# Altium PCB Tag102 Rev17.PcbDoc
Units mm, origin at the board's own origin, x right, y up, seen from the top; angles counter-clockwise.
Board outline 48.31 x 25.12 mm, 2 copper layers (TopLayer, BottomLayer), stack 1.641 mm thick; 77 components, 47 nets, 219 pads, 77 vias.
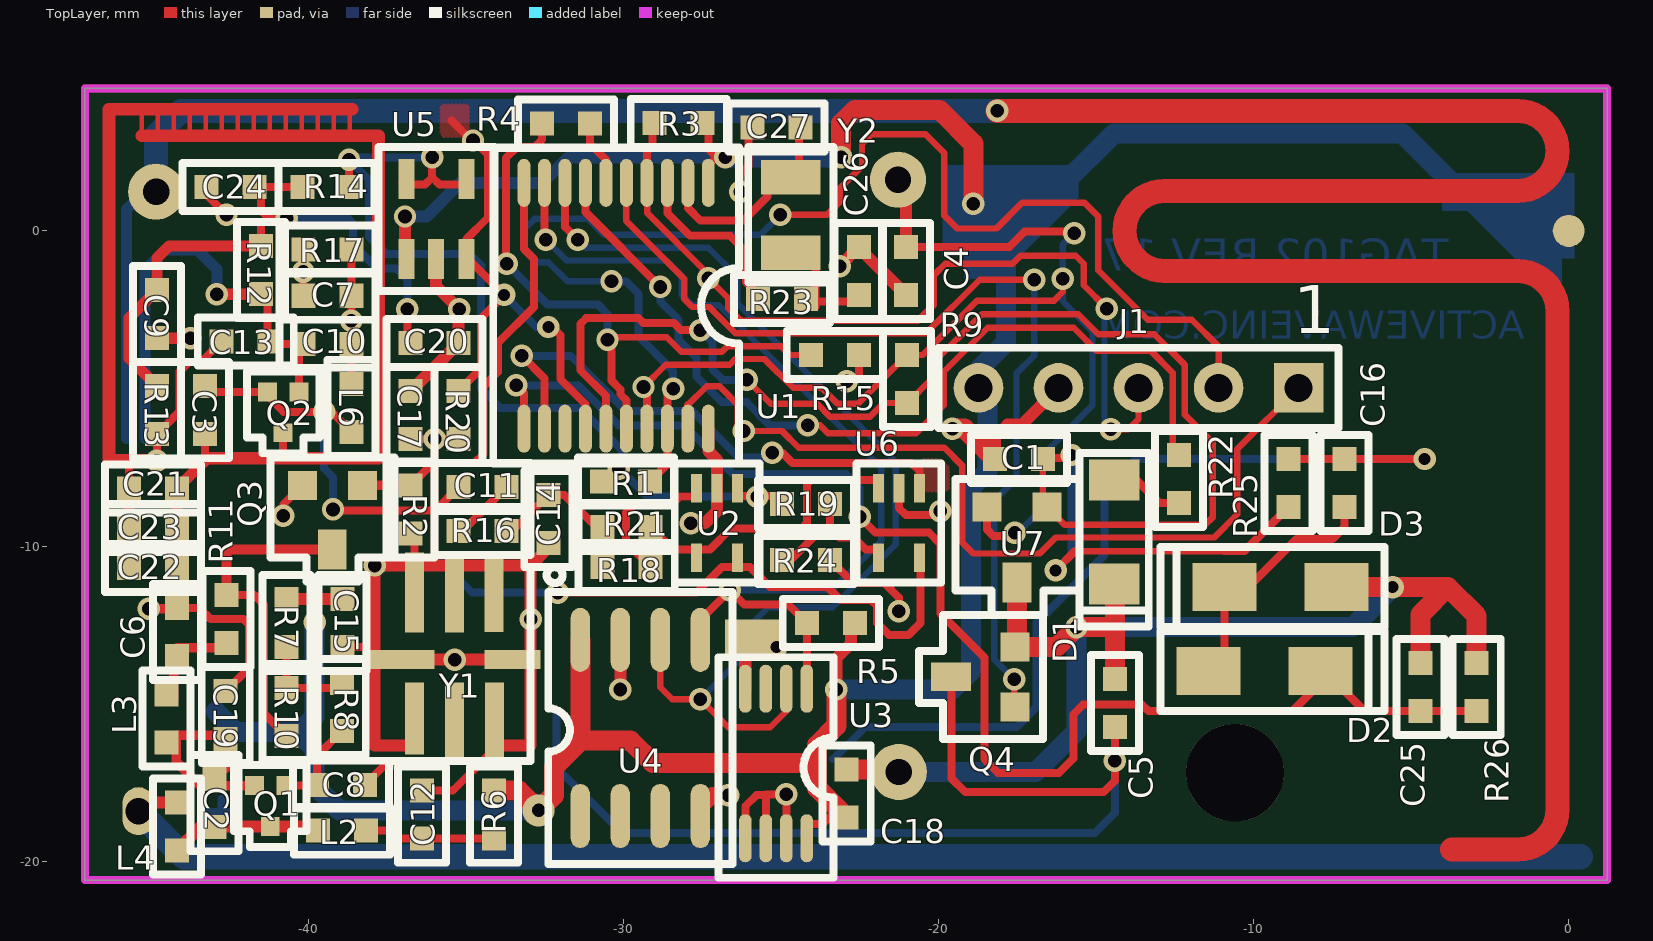
[diagram p0: TopLayer view]
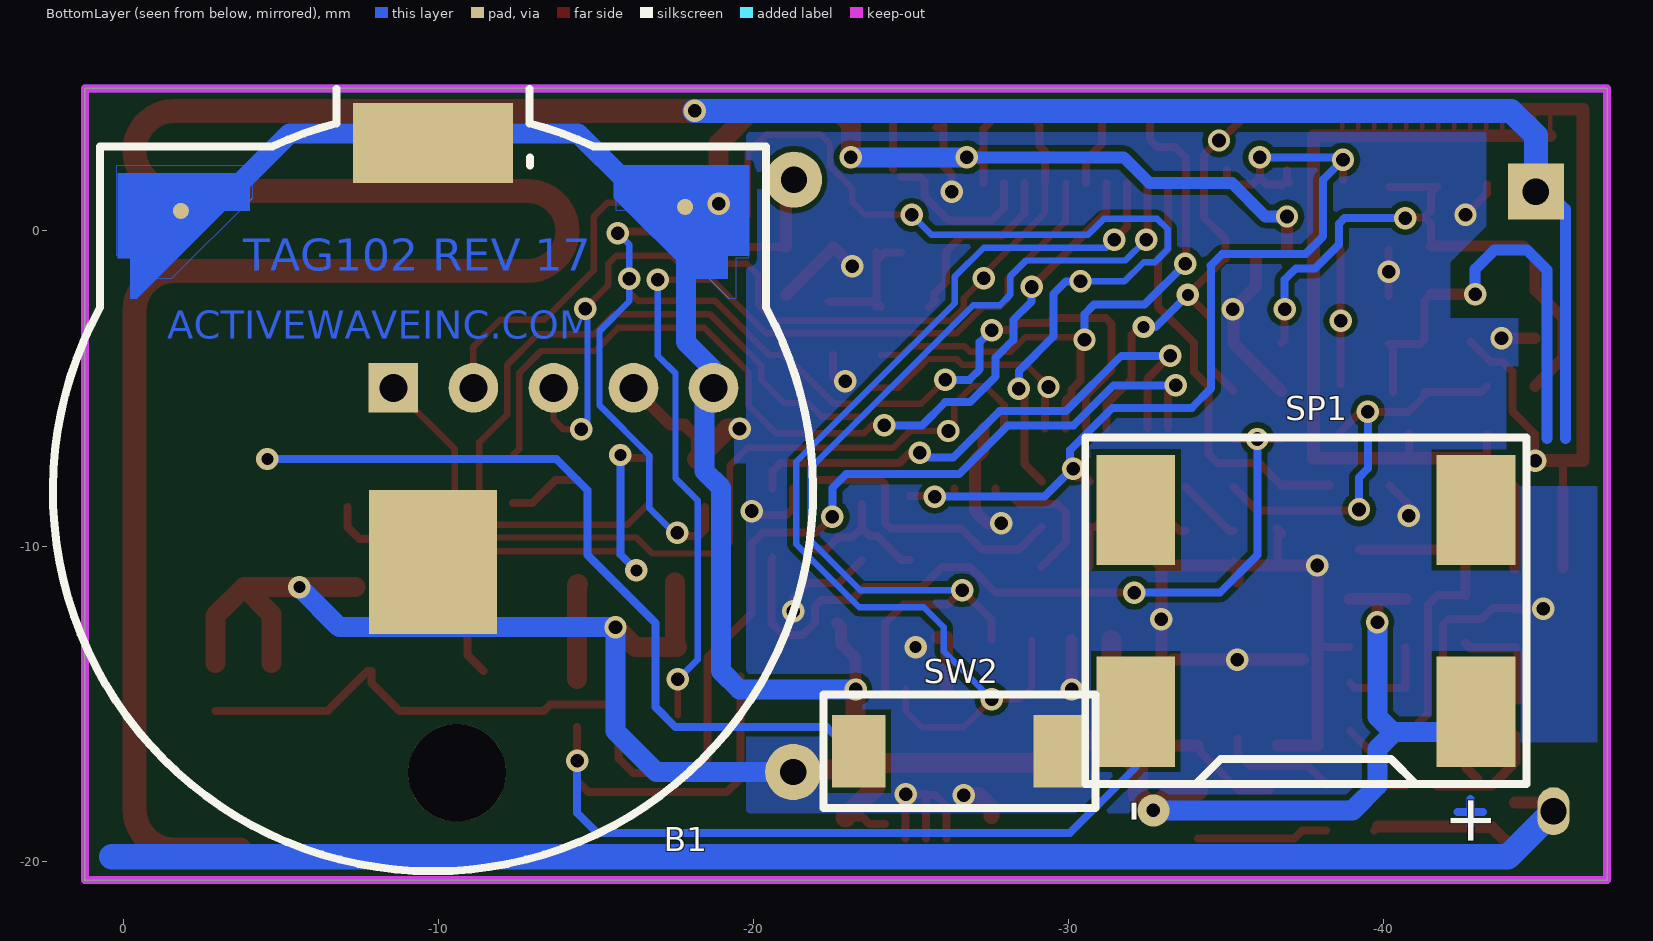
[diagram p1: BottomLayer view, seen from below]

## Layer stack, top to bottom
TopLayer: signal copper 0.0356
Dielectric: core 1.57, FR-4, Dk 4.8
BottomLayer: signal copper 0.0356

## Board outline
-47.092,4.521 1.219,4.521 1.219,-20.599 -47.092,-20.599

## Design rules (kind name [scope] priority, off if disabled: settings)
Clearance Clearance_1 [All] p1: gap=0.178
ComponentClearance [All] p1 off: gap=0.254 collisioncheckmode=0 verticalgap=0.254
HoleSize [All] p1 off: absolutevalues=TRUE maxlimit=2.54 minlimit=0.025 maxpercent=80.000 minpercent=20.000
PolygonConnect [All] p1: connectstyle=Direct reliefconductorwidth=0.508 reliefentries=4 polygonreliefangle="90 Angle"
RoutingVias [All] p1: holewidth=0.381 width=0.711 viastyle="Through Hole" minholewidth=0.381 minwidth=0.711 maxholewidth=0.381 maxwidth=0.711
ShortCircuit ShortCircuit_1 [InNet('NetC13_2') vs InNet('NetC3_1')] p1: allowed=TRUE
ShortCircuit [All] p2: allowed=FALSE
SolderMaskExpansion [All] p1: expansion=0.102
TestPointUsage [All] p1: valid=0 allowmultiple=FALSE
Testpoint [All] p1: side=15 testpointundercomponent=TRUE minsize=1.016 maxsize=2.54 preferedsize=1.524 minholesize=0.508 maxholesize=1.016 preferedholesize=0.813 testpointgrid=0.025 style=1023 order=0123456789
Width [All] p1: maxlimit=2.54 minlimit=0.152 preferedwidth=0.254
16 further rules are at their usual default settings.

## Classes and differential pairs
component class PAGE1: C1 C2 C4 C5 C6 C8 C12 C15 C16 C18 C19 C25 C26 C27 D1 D2 D3 E1 J1 L2 L3 L4 Q1 Q3 Q4 R1 R2 R3 R4 R5 R6 R7 R8 R9 R10 R11 R15 R22 R23 R25 R26 SP1 SP2 SW1 SW2 U1 U3 U4 U7 Y1 Y2
component class PAGE2: B1 C3 C7 C9 C10 C11 C13 C14 C17 C20 C21 C22 C23 C24 E2 L6 Q2 R12 R13 R14 R16 R17 R18 R19 R20 R21 R24 U2 U5 U6

## Components (designator, comment, footprint, x,y, rotation, side; value= is the part's Value field where it differs from the comment)
B1 "BATT HOLDER COIN CR2032 CUT" "BATT HOLDER COIN CR2032 CUT" -9.83,-8.255 r180 bottom
C1 "0.1 uF" 0603 -16.688,-7.239 r180 top
C2 "2 PF" 0603 -42.977,-18.923 r90 top
C3 "2 pF" 0603 -43.282,-6.452 r90 top
C4 "10pF" 0603 -21.031,-0.508 r270 top
C5 ".1uF" 0603 -14.402,-15.748 r90 top
C6 "100 pF" 0603 -44.171,-11.963 r270 top
C7 "100 pF" 0603 -38.633,-2.057 r180 top
C8 "1000 pF" 0603 -39.726,-17.577 r0 top
C9 "1000 pF" 0603 -44.806,-1.88 r270 top
C10 "1000 pF" 0603 -40.157,-3.581 r0 top
C11 ".1uF" 0603 -35.23,-8.128 r0 top
C12 "33 pF" 0603 -36.388,-19.289 r90 top
C13 "33 pF" 0603 -41.224,-3.505 r180 top
C14 "100pF" 0603 -32.385,-9.906 r90 top
C15 "0.1 uF" 0603 -38.913,-11.684 r270 top
C16 "20pF" 0603 -7.112,-8.763 r90 top
C17 ".01uF" 0603 -36.754,-5.08 r270 top
C18 "0.1 uF" 0603 -22.914,-18.618 r90 top
C19 "2.7 pF" 0603 -42.621,-16.129 r90 top
C20 "15pF" 0603 -35.23,-3.556 r180 top
C21 "1.5pF" 0603 -45.695,-8.179 r0 top
C22 "DNS" 0603 -45.695,-10.693 r0 top
C23 "DNS" 0603 -45.695,-9.423 r0 top
C24 "0.1 uF" 0603 -43.231,1.397 r0 top
C25 "0.1pF" 0603 -4.699,-15.24 r90 top
C26 "15pF" 0603 -22.53,-0.508 r270 top
C27 "15pF" 0603 -25.908,3.277 r0 top
D1 "LED" 404-1032-2-ND -14.427,-9.55 r90 top
D2 "1N4148" SOD123_021405 -9.652,-13.97 r180 top
D3 "1N4148" SOD123_021405 -9.144,-11.303 r0 top
J1 "1X5 HEADER" "1X5 HEADER" -13.652,-4.978 r180 top locked
L2 "10nH" 0603 -38.166,-19.035 r180 top
L3 "0.18uH" 0603 -44.501,-14.708 r270 top
L4 "10nH" 0603 -44.171,-18.136 r270 top
L6 "0.33uH" 0603 -38.633,-6.375 r90 top
Q1 "NE85619" "3 PIN ULTRA SUPER MINI MOLD" -41.707,-17.602 r270 top
Q2 "NE85619" "3 PIN ULTRA SUPER MINI MOLD" -41.3,-5.105 r270 top
Q3 "2N7002" "SOT23 FET" -38.278,-8.077 r180 top
Q4 "FDN327N" "SOT23 FET" -17.577,-15.113 r90 top
R1 "39K" 0603 -29.159,-7.95 r180 top
R2 "1 M" 0603 -36.754,-9.601 r90 top
R3 "39k" 0603 -29.007,3.429 r0 top
R4 "39k" 0603 -32.588,3.404 r0 top
R5 "39k" 0603 -24.181,-12.446 r0 top
R6 "22" 0603 -34.102,-19.289 r90 top
R7 "6.8K" 0603 -40.691,-11.684 r270 top
R8 "4.7 K" 0603 -38.938,-15.875 r90 top
R9 "39K" 0603 -21.006,-5.461 r90 top
R10 "39K" 0603 -40.691,-14.503 r270 top
R11 "68" 0603 -42.596,-13.081 r90 top
R12 "10" 0603 -41.504,-2.007 r90 top
R13 "10" 0603 -44.806,-4.928 r270 top
R14 "470" 0603 -40.183,1.397 r0 top
R15 "39K" 0603 -22.53,-3.937 r180 top
R16 "22K" 0603 -35.23,-9.525 r0 top
R17 "2K" 0603 -38.633,-0.584 r180 top
R18 "1K" 0603 -30.658,-10.668 r0 top
R19 "2K" 0603 -24.968,-8.661 r0 top
R20 "2.7K" 0603 -35.23,-5.08 r270 top
R21 "220K" 0603 -30.658,-9.398 r0 top
R22 "200" 0603 -12.37,-8.636 r90 top
R23 "300K" 0603 -25.73,-2.159 r0 top
R24 "100K" 0603 -24.968,-10.439 r0 top
R25 "300K" 0603 -8.89,-8.763 r90 top
R26 "4.7M" 0603 -2.921,-15.24 r90 top
SP1 "SPEAKER" SMT_1028-S-R -37.529,-12.058 r270 bottom
SW2 "TILT SWITCH" SQ-SEN-200 -26.543,-16.51 r180 bottom
U1 "PIC16F690" "SSOP20 WIDE" -27.305,1.524 r180 top locked
U2 "MIC861" SC70 -27.026,-9.271 r180 top
U3 "DS1631" "SO8 SMALL" -24.181,-14.529 r180 top locked
U4 "24aa256" SO8 -31.369,-18.567 r90 top
U5 "TC1070" SOT23-5A -36.881,-0.889 r90 top
U6 "MAX9119EXK+" SC70 -21.26,-9.271 r180 top
U7 "TLE4913" SOT23W -16.561,-8.763 r180 top
Y1 "916.5_Resonator" RESONATOR -35.357,-13.614 r0 top
Y2 "32.768KHZ CRYSTAL" "CRYSTAL ABRACON ABS07" -24.689,0.508 r270 top

## Footprints (in the part's own frame and the unit in brackets; to place one, negate y for a bottom-side part, rotate by r counter-clockwise, add the part's x,y. Pads: shape width x height; smd on the part's side, far side on the other; paste and mask are expansions set on the pad)
"1X5 HEADER" [mil]
  rect 62x62 hole 35: 1(-200,0)
  round 62 hole 35: 2(-100,0) 3(0,0) 4(100,0) 5(200,0)
  silkscreen extent -250,-50 250,50
"3 PIN ULTRA SUPER MINI MOLD" [mm]
  rect 0.6x0.6 smd: B(0,1) C(1.3,0.5) E(0,0)
  silkscreen extent -0.65,-0.65 1.95,1.65
404-1032-2-ND [mm]
  rect 1.3x1.6 smd: A(1.65,0) K(-1.65,0)
  silkscreen extent -3,-1.1 2.5,1.1
0603 [mil]
  rect 30x30 smd: 1(0,0) 2(60,0)
  silkscreen extent -30,-30 90,30
"BATT HOLDER COIN CR2032 CUT" [mil]
  rect 160x180 smd: 1(0,-88.88)
  round 20 smd: 2(-315,350) 2(315,355)
  rect 200x100 smd: 2(0,435)
  TopLayer region: -394,397 -229,397 -229,350 -260,350 -370,240 -378,240 -378,291 -394,291
  TopLayer region: 395,407 395,294 368,294 368,265 327,265 226,366 226,407
  silkscreen extent -475,-475 475,502
"CRYSTAL ABRACON ABS07" [mm]
  rect 1.1x1.9 smd: 1(-1.2,0) 2(1.2,0)
  silkscreen extent -2.15,-1.35 2.15,1.35
RESONATOR [mm]
  rect 0.6x2.54 smd: 1(1.245,2.159) 2(0,2.134) 3(-1.27,2.134) 6(0,-1.983) 7(1.27,-1.983)
  rect 2.286x0.6 smd: 4(-1.776,0.008)
  rect 0.6x2.286 smd: 5(-1.27,-1.856)
  rect 1.778x0.6 smd: 8(1.831,0.008)
  silkscreen extent 2.92,2.44 3.43,2.95
SC70 [mm]
  rect 0.35x0.9 smd: 1(-0.65,-1.1) 2(0,-1.1) 3(0.65,-1.1) 4(0.65,1.1) 5(-0.65,1.1)
  silkscreen extent -1.35,-1.89 1.35,1.89
SMT_1028-S-R [mm] "TRANSDUCER"
  rect 3.5x2.5 smd: 1(3.2,5.4) 2(3.2,-5.4) 3(-3.2,-5.4) 4(-3.2,5.4)
  silkscreen extent -5.5,-7 5.5,7
SO8 [mil]
  oval 80x24 smd: 1(0,0) 2(0,-50) 3(0,-100) 4(0,-150) 5(220,-150) 6(220,-100) 7(220,-50) 8(220,0)
  silkscreen extent -60,-190 280,40
"SO8 SMALL" [mil]
  oval 16x60 smd: 1(0,0) 2(25.59,0) 3(51.18,0) 4(76.77,0) 5(76.77,186.85) 6(51.18,186.85) 7(25.59,186.85) 8(0,186.85)
  silkscreen extent -33,-39 110,236
SOD123_021405 [mil]
  rect 80x60 smd: A(70,0) K(-70,0)
  silkscreen extent -150,-50 130,50
"SOT23 FET" [mil]
  rect 36x50 smd: D(38,80)
  rect 36x36 smd: G(0,0) S(75,0)
  silkscreen extent -40,-35 115,120
SOT23-5A [mil]
  rect 50x20 smd: 1(0,0) 2(0,-37) 3(0,-75) 4(100,-75) 5(100,0)
  silkscreen extent -40,-110 140,35
SOT23W [mil]
  rect 36x36 smd: 1(0,0) 2(74.8,0)
  rect 36x50 smd: 3(37.4,94.49)
  silkscreen extent -41,-35 114,134
SQ-SEN-200 [mm]
  rect 1.7x2.3 smd: 1(-3.2,0) 2(3.2,0)
  silkscreen extent -4.32,-1.8 4.32,1.8
"SSOP20 WIDE" [mil]
  oval 16x60 smd: 1(0,0) 2(25.59,0) 3(51.18,0) 4(76.77,0) 5(102.36,0) 6(127.95,0) 7(153.54,0) 8(179.13,0) 9(204.72,0) 10(230.32,0) 11(230.32,307.09) 12(204.72,307.09) 13(179.13,307.09) 14(153.54,307.09) 15(127.95,307.09) 16(102.36,307.09) 17(76.77,307.09) 18(51.18,307.09) 19(25.59,307.09) 20(0,307.09)
  silkscreen extent -38,-45 269,350

## Part data
B1: library part BATTERY, "Battery"
C1 C2 C3 C4 C5 C6 C7 C8 C9 C10 C12 C13 C15 C16 C18 C19 C20 C21 C23 C24 C25: library part CAP, "Capacitor"
C11 C14 C17 C26 C27: library part C
C22: library part "CAPACITOR VAR"
D2 D3: library part DIODE, "Diode"
J1: library part CON5, "Connector"
L2 L3 L4 L6: library part INDUCTOR
Q1 Q2: library part NPN1, "NPN Transistor"
Q3 Q4: library part "FET 2"
R1 R2 R3 R4 R5 R6 R7 R8 R9 R10 R15 R17 R23 R25 R26: library part RESISTOR
R11 R22: library part RES1
R12 R13 R14 R16 R18 R19 R20 R21 R24: library part R
SW2: library part "SWITCH PB"
U2: library part "OPAMP MIC861"
U4: library part 24AA256
U5: library part TC1070-2
U6: library part "COMPARATOR MAX9117"
U7: library part "HALL EFFECT SWITCH"
Y1: library part RESONATOR
Y2: library part CRYSTAL, "Crystal"

## Free pads (board coordinates)
  rect 1.88x1.143 smd: 0(-25.832,-12.903)
  round 1.016 smd: 0(0,0)
  oval 1.016x1.524 hole 0.838: 1(-45.39,-18.415)
  rect 1.778x1.778 smd far side: 1(-44.831,1.245)
  round 1.778 hole 0.838: 1(-44.831,1.245) 1(-21.285,1.626)
  round 1.778 hole 0.838 mask+0.254: 1(-21.26,-17.17)
  round 3.099 hole 3.099: 1(-10.592,-17.196)

## Via types
v1: diameter 0.711, hole 0.432, TopLayer to BottomLayer, tented both sides, 60 vias
v2: diameter 0.711, hole 0.432, TopLayer to BottomLayer, 9 vias
v3: diameter 0.711, hole 0.381, TopLayer to BottomLayer, 7 vias
v4: diameter 1.016, hole 0.432, TopLayer to BottomLayer, 1 vias

## Nets (pads, with @x,y where several pads share a name; then routed paths per layer and width w, separated by ;. In a path a pad name is that pad's centre, name@x,y a point inside that pad or via, vN(x,y) a via of type N, cw(c..) or ccw(c..) an arc to the next point about the centre after c; other vN are vias at no path point)
3V: B1.2 C15.1 C18.1 J1.5 R3.2 R5.2 R6.2 R7.1 SP1.1 U1.1 U3.8 U4.8 U5.1 | length 101
  TopLayer w0.254: R3.2 -27.305,3.251 -27.305,2.591 v1@-27.051,2.337 ; U1.1 -27.305,2.083 v1@-27.051,2.337 ; v1(-26.772,2.337) v1@-27.051,2.337 ; U3.8@-24.181,-18.821 -23.676,-18.821 -23.473,-18.618 C18.1
  TopLayer w0.381: R7.1 -39.802,-11.684 ; v1(-39.802,-12.421) -39.802,-11.684 ; C15.1 -39.802,-11.684 ; U5.1@-36.932,-0.61 v1(-36.932,0.457) ; v1(-23.241,-14.554) -23.241,-13.564 -22.784,-13.106 -22.784,-12.573 R5.2
  TopLayer w0.635: R6.2 -33.314,-17.765 v4(-32.69,-18.39) -32.21,-17.91 -32.21,-17.016 -31.369,-16.175 ; U4.8 -31.369,-16.175 ; v1(-23.241,-14.554) -23.241,-15.708 -23.851,-16.317 -23.851,-16.891 ; v1(-23.089,2.337) -23.089,3.404 -22.657,3.835 -19.964,3.835 -18.898,2.769 v1(-18.898,0.864) ; C18.1 -23.851,-17.682 -23.851,-16.891 ; -31.369,-16.175 -29.773,-16.175 -29.058,-16.891 -23.851,-16.891
  BottomLayer w0.381: v1(-36.932,0.457) -36.246,0.457 -35.179,1.524 -32.563,1.524 -31.75,2.337 v1(-26.772,2.337)
  BottomLayer w0.635: SP1.1 -42.287,-15.9 -40.284,-15.9 ; v1(-39.802,-12.421) -39.802,-15.418 -40.284,-15.9 ; v4(-32.69,-18.39) -39.014,-18.39 -39.802,-17.602 -39.802,-16.434 -40.284,-15.951 -40.284,-15.9 ; v1(-26.772,2.337) v1(-23.089,2.337) ; v1(-23.241,-14.554) -19.558,-14.554 -18.974,-13.97 -18.974,-8.153 -18.44,-7.62 -18.44,-5.271 J1.5 -18.732,-4.407 -17.856,-3.531 -17.856,-0.229 ; -16.078,1.448 -14.427,3.099 -9.83,3.099 -5.283,3.099 -3.632,1.448
+V1.2: R1.2 R14.2 R19.1 U2.1 U5.4 U5.5 | length 30.6
  TopLayer w0.254: R14.2@-38.71,1.6 v1(-38.71,2.261) ; U5.5@-37.008,1.524 U5.5@-36.932,1.6 ; U5.5@-36.932,1.93 -36.932,1.651 U5.5@-36.932,1.6 ; U5.5@-36.779,1.448 U5.5@-36.932,1.6 ; U5.5@-36.779,1.473 -36.297,1.473 -36.068,1.702 ; v1(-36.068,2.337) -36.068,1.702 ; U5.4@-35.052,1.448 -35.027,1.473 U5.4@-35.027,1.575 ; U5.4@-35.052,1.473 -35.839,1.473 -36.068,1.702 ; U5.4@-35.027,1.93 -35.027,1.651 U5.4@-35.027,1.575 ; U5.4@-34.976,1.524 U5.4@-35.027,1.575 ; R1.2 -30.556,-7.823 -30.251,-7.823 -30.061,-7.633 v1@-30.048,-7.62 ; U2.1@-26.376,-8.39 U2.1 ; U2.1@-26.358,-8.407 -25.756,-8.407 R19.1@-24.968,-8.407
  BottomLayer w0.254: v1(-38.71,2.261) -38.075,1.626 -38.075,-0.178 -37.516,-0.737 -34.874,-0.737 -34.51,-1.101 ; v1@-38.71,2.337 v1(-36.068,2.337) ; -34.519,-1.109 -34.519,-5.004 -33.909,-5.613 -31.394,-5.613 -30.048,-6.96 -30.048,-7.544 -30.048,-7.62 -29.235,-8.433 v1(-25.756,-8.433)
  other v1: -30.15,-7.544
ANT: L4.1 pad.1@-45.39,-18.415 | length 47.2
  TopLayer w0.381: pad.1@-45.11,-18.136 L4.1
  BottomLayer w0.813: pad.1@-45.364,-18.44 -43.942,-19.863 0.356,-19.863
ENABLE_RCVR: R20.1 U1.14 U5.3 | length 16.1
  TopLayer w0.254: -35.458,3.505 v2@-34.798,2.845 ; R20.1 -34.519,-4.369 -34.519,-2.769 v3(-33.782,-2.032) -34.925,-0.889 U5.3 -34.976,-0.254 -34.29,0.432 -34.29,2.413 -34.747,2.87 v2(-34.773,2.87) ; v3(-32.385,-3.048) -32.258,-3.048 -32.004,-3.302 -32.004,-4.699 -31.205,-5.498 U1.14
  BottomLayer w0.254: v3(-33.782,-2.032) -32.766,-3.048 v3(-32.385,-3.048)
GND: B1.1 C1.2 C4.2 C5.2 C6.1 C7.2 C9.2 C12.2 C14.1 C15.2 C17.1 C18.2 C19.2 C20.1 C24.1 C25.2 C26.1 C27.1 D1.K D3.A J1.4 pad.0@-25.832,-12.903 pad.1@-21.26,-17.17 Q3.S Q4.S R2.1 R15.1 R17.2 R24.2 R26.2 SW2.2 U1.20 U2.2 U3.4 U3.5 U3.6 U3.7 U4.4 U4.7 U5.2 U6.2 U7.3 Y1.1 Y1.2 Y1.3 Y1.4 Y1.5 Y1.7 Y1.8 | length 115.6
  TopLayer w0.254: C6.1 -43.459,-11.963 -43.104,-12.319 -42.062,-12.319 -41.885,-12.497 -41.885,-13.868 C19.2 ; C24.1@-43.282,1.473 -43.282,1.397 -43.282,1.194 v1(-42.596,0.508) ; v1(-40.792,-9.042) -40.792,-8.687 Q3.S ; C7.2 v1(-40.157,-1.295) R17.2 ; C15.2 -37.948,-13.208 -37.897,-13.157 ; R2.1 -36.63,-9.725 Y1.3@-36.63,-10.617 ; C12.2 -35.418,-17.765 -34.188,-16.535 -34.188,-16.434 Y1.7@-34.087,-16.332 ; Y1.2@-35.357,-10.617 Y1.2@-35.233,-10.494 ; v1(-26.289,1.245) -26.289,1.803 -26.035,2.057 -26.035,3.277 C27.1@-26.035,3.353 ; U3.5 -26.131,-18.257 -25.781,-17.907 -25.495,-17.907 -25.481,-17.893 ; C27.1 C27.1@-25.806,3.277 ; U3.6 -25.481,-17.893 ; U3.7 v1(-24.831,-17.878) -25.466,-17.878 -25.481,-17.893 ; R24.2 -22.708,-11.176 -21.717,-11.176 -21.26,-11.633 v1(-21.26,-12.065) ; v1(-22.911,-4.775) -22.682,-4.775 -22.53,-4.623 R15.1 ; pad.1@-21.336,-17.094 pad.1@-21.26,-17.17 ; U6.2 -21.26,-8.788 -21.031,-9.017 v1@-19.939,-9.017
  TopLayer w0.305: v1(-45.06,-11.989) C6.1@-44.171,-11.989 ; R2.1 R2.1@-36.627,-9.474
  TopLayer w0.356: C9.2 v1(-43.739,-3.404)
  TopLayer w0.381: Y1.4@-37.438,-13.606 Y1.4 v1(-35.357,-13.606) Y1.8 Y1.8@-33.319,-13.606 ; C17.1 C20.1 -35.23,-2.515 v1(-35.204,-2.489) -35.941,-1.753 U5.2 ; Y1.5@-36.627,-16.332 -37.897,-16.332 -37.897,-13.606 -37.897,-13.157 v1(-37.897,-10.617) -36.63,-10.617 -36.627,-10.617 Y1.2@-35.357,-10.617 ; Y1.2@-35.357,-11.125 Y1.2@-35.357,-10.617 ; Y1.7@-34.087,-16.332 -32.944,-16.332 -32.944,-13.606 v1(-32.944,-12.319) -32.944,-10.617 ; C14.1 -32.385,-10.058 -32.944,-10.617 ; v1(-30.099,-14.554) U4.7 ; v1(-27.864,-9.271) -27.407,-9.271 -27.026,-8.89 U2.2 -27.026,-7.264 -27.305,-6.985 U1.20 ; v1(-23.139,-1.118) C26.1@-22.543,-0.521 ; C26.1 C26.1@-22.543,-0.521 ; C4.2 C26.1@-22.543,-0.521 ; C1.2 -18.212,-6.553 -17.805,-6.147 -17.361,-6.147 J1.4 ; Y1.2@-35.357,-10.617 -34.112,-10.617 -32.944,-10.617
  TopLayer w0.406: U3.4 -26.131,-12.903 pad.0@-25.832,-12.903
  TopLayer w0.508: U4.4 -27.559,-18.288 -27.178,-17.907 v1(-26.67,-17.907)
  TopLayer w0.635: C18.2 pad.1@-21.336,-17.094 ; v1(-19.558,-6.274) -19.177,-6.274 C1.2 ; U7.3 -17.511,-13.142 Q4.S -16.256,-13.208 v1(-15.621,-12.573) -14.402,-12.573 ; D1.K -14.402,-11.226 -14.402,-12.573 ; C5.2 -14.402,-12.573 ; D3.A v3(-5.588,-11.303) -3.835,-11.303 ; C25.2 -4.699,-12.167 -3.835,-11.303 ; R26.2 -2.921,-12.217 -3.835,-11.303
  BottomLayer w0.635: pad.1@-21.26,-17.17 -16.916,-17.17 -15.621,-15.875 v1(-15.621,-12.573) -9.83,-12.573 -6.858,-12.573 v3(-5.588,-11.303)
  other v1: -19.939,-8.89
  other v3: -25.146,-13.208
I2CSCL: U1.8 U3.2 U4.6 | length 33.7
  TopLayer w0.203: U4.6 -28.829,-14.478 -28.448,-14.859 v1(-27.559,-14.859) -26.67,-15.748 -25.339,-15.748 -24.831,-15.24 U3.2
  TopLayer w0.254: U1.8 -31.855,0.13 v1(-31.445,-0.279)
  BottomLayer w0.203: v1(-31.445,-0.279) -31.191,-0.533 -27.305,-0.533 -26.391,-1.448 -26.391,-2.3 -21.361,-7.329 -21.361,-9.947 -23.36,-11.946 ; v1(-27.559,-14.859) -26.035,-13.335 -26.035,-12.573 -25.4,-11.938 -23.368,-11.938
I2CSDA: R5.1 U1.9 U3.1 U4.5 | length 30.4
  TopLayer w0.254: v1@-32.505,-0.236 U1.9 ; U4.5 -27.559,-12.344 v1(-26.619,-11.405) -26.162,-11.862 -24.765,-11.862 R5.1 U3.1
  BottomLayer w0.203: v1(-32.461,-0.279) -31.801,-0.94 -28.651,-0.94 -28.143,-1.448 -28.143,-2.032 -27.813,-2.362 -26.975,-2.362 -21.819,-7.518 -21.819,-9.83 -23.393,-11.405 v1(-26.619,-11.405)
  BottomLayer w0.254: v1(-32.461,-0.279) v1@-32.45,-0.279
"LED OUT": R22.2 U1.7 | length 28.8
  TopLayer w0.203: v2(-24.155,-6.173) -23.749,-6.173 -23.495,-6.426 -20.726,-6.426 -19.837,-5.537 -19.837,-4.47 -18.44,-3.073 -15.713,-3.073 -14.977,-3.81 -13.259,-3.81 -12.573,-4.496 -12.573,-6.909 R22.2
  TopLayer w0.254: U1.7 -31.205,0.598 v1(-28.829,-1.778)
  BottomLayer w0.254: v1(-28.829,-1.778) -28.829,-2.235 -28.245,-2.819 -28.245,-3.454 -27.686,-4.013 -27.686,-4.623 -26.873,-5.436 -26.086,-5.436 -25.349,-6.173 v2(-24.155,-6.173)
NetC2_1: C2.1 L2.2 L4.2 Q1.C | length 4.8
  TopLayer w0.254: L2.2@-39.823,-18.902 L2.2
  TopLayer w0.381: L4.2 -43.434,-18.923 C2.1 ; C2.1@-42.977,-18.902 Q1.C L2.2@-39.823,-18.902
NetC2_2: C2.2 C19.1 L3.2 Q1.E | length 6.7
  TopLayer w0.305: C2.2 -42.621,-17.043 C19.1 -42.748,-16.002 -44.196,-16.002 -44.196,-16.232 -44.196,-16.84 -43.434,-17.602 -42.977,-17.602 Q1.E
NetC3_1: C3.1 C21.2 C22.2 C23.2 Q2.C | length 7.9
  TopLayer w0.254: C3.1 -43.282,-7.137 -43.205,-7.214 ; Q2.C -40.8,-7.206 -40.792,-7.214
  TopLayer w0.356: C22.2 C23.2 C21.2 -43.205,-7.214
  TopLayer w0.406: -43.205,-7.214 -40.792,-7.214
NetC3_2: C3.2 C11.1 L6.1 Q2.E | length 12.8
  TopLayer w0.254: C3.2 -43.104,-5.105 Q2.E -41.3,-5.232 -40.792,-5.74 v1(-39.497,-5.74) -39.268,-5.74 L6.1 ; v1(-39.218,-8.839) -39.192,-8.865 -35.966,-8.865 C11.1
  BottomLayer w0.254: v1(-39.497,-5.74) -39.497,-7.544 -39.218,-7.823 v1(-39.218,-8.839)
NetC5_1: C5.1 Q4.D SP1.2 | length 32.7
  TopLayer w0.254: Q4.D@-19.583,-14.148 -19.583,-17.374 -19.152,-17.805 -14.757,-17.805 -14.402,-17.45 v1(-14.402,-16.815) C5.1
  BottomLayer w0.254: SP1.2 -32.129,-17.02 -30.048,-19.101 -15.037,-19.101 -14.402,-18.466 v1(-14.402,-16.815)
NetC6_2: C6.2 L3.1 R11.1 | length 3.1
  TopLayer w0.305: L3.1@-44.272,-14.884 -44.272,-14.708 -44.272,-13.487 C6.2@-44.272,-13.386 ; C6.2@-44.171,-13.233 -42.748,-13.233 R11.1
NetC7_1: C7.1 C10.2 L6.2 R17.1 | length 4.3
  TopLayer w0.254: L6.2 C10.2 v2(-38.633,-2.845) C7.1 R17.1
NetC8_1: C8.1 Q1.B R8.1 | length 3
  TopLayer w0.254: Q1.B -39.726,-17.602 C8.1 -39.726,-16.662 R8.1
NetC8_2: C8.2 Y1.6 | length 3.7
  TopLayer w0.254: C8.2 -37.592,-16.967 -35.738,-16.967 -35.357,-16.586 Y1.6@-35.357,-16.105
NetC9_1: C9.1 C20.2 C24.2 R12.2 R13.1 R14.1 | length 19.6
  TopLayer w0.254: R12.2 -41.504,0.216 -41.287,0.433 ; v1(-40.687,0.406) -40.713,0.433 -41.287,0.433 ; R14.1 C24.2 -41.504,1.219 -41.504,0.649 -41.287,0.433 ; v1(-36.855,-2.489) -36.855,-3.454 C20.2
  TopLayer w0.356: R13.1 -45.695,-4.039 -45.695,-2.769 C9.1 -44.806,-0.864 -44.425,-0.483 R12.2
  BottomLayer w0.254: v1(-40.687,0.406) -38.76,0.406 -38.583,0.229 -38.583,-0.432 -37.821,-1.194 -37.211,-1.194 -36.855,-1.549 v1(-36.855,-2.489)
NetC10_1: C10.1 C13.1 Q2.B R12.1 | length 14.6
  TopLayer w0.254: R12.1 -41.3,-2.21 -41.3,-3.429 C13.1 -41.148,-3.581 C10.1 -40.3,-3.724 Q2.B
  TopLayer w0.356: v1(-42.901,-2.007) R12.1
  BottomLayer w0.356: -45.187,-6.579 -45.187,-1.245 -44.552,-0.61 -43.51,-0.61 -42.901,-1.219 v1(-42.901,-2.007)
NetC11_2: C11.2 R16.1 | length 2.1
  TopLayer w0.254: R16.1 -35.103,-9.525 C11.2
NetC12_1: C12.1 L2.1 R6.1 | length 4.2
  TopLayer w0.254: L2.1 -37.404,-19.035 -37.15,-19.289 C12.1 R6.1
NetC13_2: C13.2 C21.1 C22.1 C23.1 R13.2 | length 61.6
  TopLayer w0.152: -45.288,3.023 -45.288,3.861 ; -44.78,3.023 -44.78,3.861 ; -44.272,3.023 -44.272,3.861 ; -43.764,3.023 -43.764,3.861 ; -43.256,3.023 -43.256,3.861 ; -42.748,3.023 -42.748,3.861 ; -42.24,3.023 -42.24,3.861 ; -41.732,3.023 -41.732,3.861 ; -41.224,3.023 -41.224,3.861 ; -40.716,3.023 -40.716,3.861 ; -40.208,3.023 -40.208,3.861 ; -39.7,3.023 -39.7,3.861 ; -39.192,3.023 -39.192,3.861 ; -38.684,3.023 -38.684,3.861
  TopLayer w0.254: -45.695,-8.611 C21.1 -45.695,-7.29 ; v1(-44.806,-7.29) R13.2 -44.087,-5.733 -44.087,-4.467 -43.787,-4.167 -43.41,-4.167 C13.2 C13.2@-42.748,-3.531 ; -40.8,-7.206 -40.792,-7.214
  TopLayer w0.356: C22.1 C23.1 C21.1
  TopLayer w0.406: -45.288,3.023 -44.78,3.023 -44.272,3.023 -43.764,3.023 -43.256,3.023 -42.748,3.023 -42.24,3.023 -41.732,3.023 -41.224,3.023 -40.716,3.023 -40.208,3.023 -39.7,3.023 -39.192,3.023 -38.684,3.023 -37.77,3.023 -37.77,-7.214 -40.792,-7.214 ; v1(-44.806,-7.29) -45.695,-7.29 -46.33,-7.29 -46.33,3.861 -45.288,3.861 -44.78,3.861 -44.272,3.861 -43.764,3.861 -43.256,3.861 -42.748,3.861 -42.24,3.861 -41.732,3.861 -41.224,3.861 -40.716,3.861 -40.208,3.861 -39.7,3.861 -39.192,3.861 -38.684,3.861 -38.608,3.861
NetC14_2: C14.2 R16.2 R18.1 R21.1 | length 5.2
  TopLayer w0.254: R16.2 -33.528,-9.525 C14.2 -31.877,-8.382 -30.861,-9.398 R21.1 R18.1
NetC16_1: C16.1 D2.A D3.K | length 8.1
  TopLayer w0.254: D2.A -10.922,-13.462 D3.K -10.16,-11.303 -8.636,-9.779 -7.493,-9.779 -7.112,-9.398 C16.1
NetC16_2: C16.2 R25.2 SW2.1 | length 29.8
  TopLayer w0.254: R25.2 C16.2 v3(-4.572,-7.239)
  BottomLayer w0.254: SW2.1@-23.343,-16.764 -23.216,-16.637 -22.327,-15.748 -17.526,-15.748 -16.891,-15.113 -16.891,-12.446 -14.732,-10.287 -14.732,-8.23 -13.741,-7.239 v3(-4.572,-7.239)
NetC17_2: C17.2 R20.2 U2.5 U6.5 | length 24.9
  TopLayer w0.254: C17.2 v1(-35.992,-6.604) R20.2 ; v1(-32.08,-11.481) -27.686,-11.481 -26.873,-10.668 -26.376,-10.668 -25.984,-10.668 -25.349,-11.303 -23.52,-11.303 -23.114,-11.709 -22.149,-11.709 -21.946,-11.913 -21.946,-12.446 -21.565,-12.827 -20.955,-12.827 -20.574,-12.446 -20.574,-10.407 U6.5
  BottomLayer w0.254: v1(-35.992,-6.604) -35.992,-10.287 -34.798,-11.481 v1(-32.08,-11.481)
NetC26_2: C26.2 R23.2 Y2.2 | length 4.3
  TopLayer w0.254: Y2.2 -24.149,-0.692 Y2.2@-23.952,-0.889 ; R23.2@-24.054,-2.413 -24.003,-2.362 R23.2@-23.901,-2.261 ; R23.2@-23.901,-2.413 R23.2@-23.901,-2.261 ; Y2.2@-23.901,-0.66 -23.901,-0.692 -23.901,-2.159 -23.901,-2.21 R23.2@-23.876,-2.235 ; C26.2@-22.377,-2.235 -22.53,-2.235 R23.2@-23.876,-2.235 ; R23.2@-23.901,-2.261 R23.2@-23.876,-2.235
NetC27_2: C27.2 U1.2 Y2.1 | length 6.5
  TopLayer w0.254: U1.2 -27.955,0.726 -27.559,0.33 -26.187,0.33 -25.425,1.092 -25.425,1.575 -25.292,1.708 Y2.1 ; Y2.1@-24.435,1.962 -24.435,3.277 C27.2@-24.435,3.429
NetD1_A: D1.A R22.1 | length 2.4
  TopLayer w0.254: D1.A -13.716,-7.9 -12.98,-8.636 R22.1
NetQ3_D: Q3.D R10.2 R11.2 | length 10.6
  TopLayer w0.254: R11.2 -41.707,-11.557 -41.402,-11.862 -41.402,-15.316 R10.2
  TopLayer w0.305: R11.2 -42.596,-10.109 Q3.D
NetR7_2: R7.2 R8.2 R10.1 | length 3.1
  TopLayer w0.254: R7.2 R10.1 -39.091,-14.503 R8.2
NetR18_2: R18.2 U2.3 | length 4.8
  TopLayer w0.254: R18.2 -29.921,-9.881 -29.921,-8.941 -29.642,-8.661 -28.448,-8.661 -28.219,-8.433 -27.686,-8.433 -27.686,-8.181 U2.3
NetR19_2: R19.2 R24.1 U6.4 | length 4.5
  TopLayer w0.254: R24.1 -24.689,-10.439 -23.927,-9.677 -23.698,-9.677 -23.444,-9.423 ; R19.2 -23.444,-9.423 ; U6.4@-21.92,-10.109 -22.308,-10.109 -22.689,-9.728 -23.139,-9.728 -23.444,-9.423
NetR21_2: R21.2 U2.4 U6.3 | length 9.4
  TopLayer w0.254: R21.2 -28.423,-10.109 -27.676,-10.109 -27.254,-10.109 -26.594,-9.449 -24.359,-9.449 -24.181,-9.271 -24.181,-8.052 -24.028,-7.899 -21.92,-7.899 -21.92,-8.161 U6.3
NetR23_1: R23.1 U1.3 | length 5.9
  TopLayer w0.254: U1.3 -28.605,0.563 -27.889,-0.152 -26.619,-0.152 -26.111,-0.66 -26.111,-1.626 -25.73,-2.007 R23.1 ; R23.1@-25.781,-2.21 R23.1@-25.578,-2.413
"PANIC SWITCH": U1.13
"PROG CLK": J1.2 R1.1 U1.18 | length 42.9
  TopLayer w0.203: v1(-25.019,0.508) -23.546,0.508 -23.139,0.914 -23.139,1.346 -22.428,2.057 -22.428,2.769 -22.123,3.073 -20.422,3.073 -19.812,2.464 -19.812,0.483 -19.406,0.076 -18.161,0.076 -17.348,0.889 -15.367,0.889 -14.935,0.457 -14.935,-1.245 -13.36,-2.819 -11.963,-2.819 -11.112,-3.67 J1.2
  TopLayer w0.254: R1.1 -28.605,-7.396 U1.18 -28.605,-5.186 v1(-28.423,-5.004)
  BottomLayer w0.203: v2(-30.378,-1.6) -31.775,-1.6 -32.385,-0.991 -32.741,-0.991 -33.147,-0.584 -33.147,0.051 -32.817,0.381 -31.115,0.381 -30.607,-0.127 -25.654,-0.127 v1(-25.019,0.508)
  BottomLayer w0.254: v2(-30.378,-1.6) -29.921,-1.6 -29.515,-2.007 -29.515,-3.353 -28.423,-4.445 v1(-28.423,-5.004)
"PROG DATA": J1.1 U1.19 | length 27.8
  TopLayer w0.203: U1.19@-27.955,-5.527 -27.356,-4.928 -26.949,-4.928 -26.365,-5.512 v2@-26.365,-6.172 ; v2(-26.187,-6.35) -24.968,-6.35 -24.435,-6.883 -19.812,-6.883 -19.253,-7.442 -19.253,-9.881 -18.898,-10.236 -16.789,-10.236 -16.281,-9.728 -11.252,-9.728 -10.516,-8.992 -10.516,-6.921 J1.1
  TopLayer w0.254: U1.19 U1.19@-27.955,-5.527 ; v2@-26.365,-6.172 v2(-26.187,-6.35)
"PROG MCLR": J1.3 R3.1 U1.4 | length 27.7
  TopLayer w0.203: U1.4@-29.244,1.513 -29.244,0.568 -27.305,-1.372 v2(-27.305,-1.499) -26.67,-2.134 -26.67,-2.448 -26.273,-2.845 -20.65,-2.845 -20.142,-2.337 -20.142,-1.397 -19.787,-1.041 -17.653,-1.041 -17.399,-0.787 -15.646,-0.787 -15.392,-1.041 -15.392,-1.727 v1(-14.656,-2.464) ; v1(-14.529,-6.299) -13.97,-6.299 -13.652,-5.982 J1.3
  TopLayer w0.254: U1.4@-29.255,1.513 U1.4 -29.255,2.52 -29.083,2.692 -29.083,3.353 R3.1
  BottomLayer w0.203: v1(-14.656,-2.464) -14.732,-2.54 -14.732,-6.096 v1(-14.529,-6.299)
"RX DATA": U1.12 U6.1 | length 17.4
  TopLayer w0.254: v2(-33.223,-3.962) -32.505,-4.681 U1.12 ; v1(-25.273,-7.036) -24.968,-7.036 -24.638,-7.366 -20.853,-7.366 -20.61,-7.61 U6.1
  BottomLayer w0.254: v2(-33.223,-3.962) -31.674,-3.962 -29.921,-5.715 -27.813,-5.715 -26.34,-7.188 -25.425,-7.188 v1(-25.273,-7.036)
"SPEAKER OUT": Q4.G U1.5 | length 31.3
  TopLayer w0.203: U1.5 -29.905,0.314 -28.067,-1.524 -28.067,-2.159 -27.813,-2.413 -27.28,-2.413 -26.441,-3.251 -20.396,-3.251 -18.694,-1.549 v1(-16.967,-1.549) ; Q4.G@-17.602,-15.367 -17.602,-15.113 v1(-17.602,-14.224)
  BottomLayer w0.203: v1(-17.602,-14.224) -18.237,-13.589 -18.237,-8.56 -17.526,-7.849 -17.526,-4.521 -16.967,-3.962 v1(-16.967,-1.549)
"TAMPER PWR": C1.1 R9.1 R25.1 U1.15 U7.1 | length 52.4
  TopLayer w0.203: v1(-26.086,-4.724) -25.324,-5.486 -23.851,-5.486 -23.444,-5.893 -22.174,-5.893 -21.742,-5.461 R9.1 -20.98,-5.461 -20.244,-4.724 -20.244,-4.267 -18.618,-2.642 -15.57,-2.642 -14.935,-3.277 -13.157,-3.277 -12.192,-4.242 -12.192,-5.817 -11.303,-6.706 -11.303,-9.093 -11.532,-9.322 -16.002,-9.322 U7.1 -16.688,-8.636 C1.1 ; -15.672,-10.16 -10.922,-10.16
  TopLayer w0.254: U1.15 -30.555,-5.234 -31.369,-4.42 -31.369,-2.958 -31.18,-2.769 -29.515,-2.769 -29.362,-2.921 -28.397,-2.921 -28.169,-3.15 v1(-27.559,-3.15) ; C1.1@-16.694,-7.214 -16.688,-7.214 -15.875,-7.214 v3(-15.773,-7.112) ; v3(-16.281,-10.77) -15.672,-10.16 ; -10.922,-10.16 -10.287,-10.16 R25.1
  BottomLayer w0.254: v1(-27.559,-3.15) -27.178,-3.531 -27.178,-4.394 -26.848,-4.724 v1(-26.086,-4.724) ; v3(-16.281,-10.77) -15.773,-10.262 v3(-15.773,-7.112)
"TAMPER SIG": C4.1 pad.1@-21.285,1.626 R9.2 U1.17 U7.2 | length 38.2
  TopLayer w0.203: v2(-29.362,-4.953) -28.659,-4.25 -26.627,-4.25 -26.441,-4.064 -25.527,-4.064 -24.613,-4.978 -23.712,-4.978 -23.204,-5.486 -22.555,-5.486 R9.2 -20.498,-3.937 -18.771,-2.21 -16.332,-2.21 -16.053,-1.93 v1(-16.053,-1.524)
  TopLayer w0.254: v2(-29.362,-4.953) -29.255,-5.06 U1.17 ; C4.1 -17.755,-0.508 -17.272,-0.025 v1@-15.748,-0.025 ; R9.2@-21.006,-4.013 R9.2 ; U7.2 -18.461,-9.479 -18.263,-9.677 -17.577,-9.677 v1@-17.526,-9.627
  TopLayer w0.381: pad.1@-21.285,1.626 -21.031,1.372 C4.1
  BottomLayer w0.203: v1@-17.526,-9.627 -16.694,-8.794 -16.694,-7.118 -15.113,-5.537 -15.113,-3.175 -16.053,-2.235 v1(-16.053,-1.524) -16.053,-0.432 v1(-15.697,-0.076)
  other v1: -17.577,-9.576
"TILT SENSOR": C25.1 D2.K R26.1 U1.11 | length 43.8
  TopLayer w0.254: v1(-33.401,-4.902) -33.155,-5.148 U1.11 ; v1(-22.504,-9.068) -21.996,-9.576 -20.295,-9.576 -19.939,-9.931 -19.939,-12.141 -18.542,-13.538 -18.542,-16.764 -18.11,-17.196 -16.18,-17.196 -15.723,-16.739 -15.723,-15.342 -15.418,-15.037 -13.538,-15.037 -13.335,-15.24 -8.763,-15.24 -7.874,-14.351 D2.K -7.747,-13.97 -6.477,-15.24 C25.1 R26.1
  BottomLayer w0.254: v1(-33.401,-4.902) -31.42,-4.902 -30.15,-6.172 -28.067,-6.172 -26.518,-7.722 -22.936,-7.722 -22.504,-8.153 v1(-22.504,-9.068)
"TX DATA": Q3.G R2.2 U1.10 | length 13.6
  TopLayer w0.254: R2.2 -36.043,-7.366 -34.722,-7.366 -34.442,-7.087 -34.442,-4.939 -33.985,-4.482 -33.985,-3.556 -32.842,-2.413 -32.842,-0.889 -33.155,-0.576 U1.10
  TopLayer w0.305: Q3.G R2.2
VMP: R4.2 U1.6 | length 2.1
  TopLayer w0.254: R4.2 -31.064,2.769 -30.555,2.259 U1.6
VMS: R4.1 R15.2 U1.16 | length 19.6
  TopLayer w0.203: v1(-30.505,-3.454) -30.429,-3.378 -28.626,-3.378 -28.169,-3.835 -26.873,-3.835 -26.695,-3.658 -24.994,-3.658 -24.714,-3.937 R15.2
  TopLayer w0.254: v2@-33.731,-1.016 -33.731,2.311 -33.376,2.667 -32.817,2.667 -32.588,2.896 R4.1 ; v1@-30.378,-3.607 -30.378,-4.75 -30.098,-5.03 -30.098,-5.183 -29.905,-5.376 U1.16
  BottomLayer w0.254: v2(-33.706,-1.041) -32.41,-2.337 -30.81,-2.337 -30.505,-2.642 v1(-30.505,-3.454)
pads on no net: SP1.3 SP1.4 U3.3 U4.1 U4.2 U4.3
copper on no net: | length 107.7
  TopLayer w0.762: v1(-18.136,3.81) -1.626,3.81 cw(c-1.626,2.54) -0.356,2.54 cw(c-1.626,2.54) -1.626,1.27 -12.827,1.27 ccw(c-12.827,0) -14.097,0 ccw(c-12.827,0) -12.827,-1.27 -1.626,-1.27 cw(c-1.626,-2.54) -0.356,-2.54 -0.356,-18.364 cw(c-1.626,-18.364) -1.626,-19.634 -3.708,-19.634
  BottomLayer w0.254: -43.155,-18.44 -42.342,-18.44 ; -42.748,-18.847 -42.748,-18.034
  BottomLayer w0.356: -45.771,-6.579 -45.771,0.686 -45.212,1.245 -44.831,1.245
  BottomLayer w0.762: -44.831,1.245 -44.831,3.023 -44.044,3.81 v1(-18.136,3.81)

## Polygon pours and split planes (outlines as drawn)
"RX DATA" on TopLayer "TopLayer-ENABLE_RCVR" (hatched 90Degree grid 0.127 track 0.203, remove dead copper, pour order 1000): -20.498,-7.315 -20.498,-8.204 -19.736,-8.204 -19.736,-7.315
ENABLE_RCVR on TopLayer "TopLayer-ENABLE_RCVR" (hatched 90Degree grid 0.127 track 0.203, remove dead copper, pour order 1000): -35.738,3.937 -35.738,3.048 -34.976,3.048 -34.976,3.937
3V on BottomLayer "BottomLayer-3V 1" (hatched 90Degree grid 0.127 track 0.203, remove dead copper, pour order 1001): -15.646,0.635 -15.646,1.829 -19.837,1.829 -19.837,-0.864 -19.431,-0.864 -19.431,-2.159 -19.228,-2.159 -16.434,0.635
3V on BottomLayer "BottomLayer-3V" (hatched 90Degree grid 0.127 track 0.203, remove dead copper, pour order 1000): -0.483,-1.524 -0.483,-0.787 0.203,-0.787 0.203,2.083 -4.089,2.083 -4.089,1.041 -1.524,-1.524
GND on BottomLayer "BottomLayer-GND 3" (solid, remove dead copper, pour order 1005): -47.069,-8.099 -43.894,-8.099 -43.894,-4.289 -44.275,-4.289 -44.275,-2.765 -42.116,-2.765 -42.116,-0.987 -43.259,0.156 -43.259,3.127 -19.764,3.127 -19.766,-5.947 -19.385,-5.947 -19.385,-7.369 -19.766,-7.369 -19.764,-18.488 -40.719,-18.488 -40.719,-16.227 -47.069,-16.227
no net on BottomSolder (hatched 90Degree grid 0.127 track 0.203, remove dead copper): -15.646,0.635 -15.646,1.829 -19.837,1.829 -19.837,-0.864 -19.431,-0.864 -19.431,-2.159 -19.228,-2.159 -16.434,0.635
no net on BottomSolder (hatched 90Degree grid 0.127 track 0.203, remove dead copper): -0.483,-1.524 -0.483,-0.787 0.203,-0.787 0.203,2.083 -4.089,2.083 -4.089,1.041 -1.524,-1.524

## Keep-outs
KeepOutLayer:
  the board outline again, w0.254

## Other copper
TopLayer:
  text ".Layer_Name" at -35.763,-24.003 h2.03
BottomLayer:
  text "TAG102 REV 17" at -3.81,-1.27 h1.02
  text "ACTIVEWAVEINC.COM" at -1.397,-3.429 h0.89
  text ".Layer_Name" at -26.746,-24.003 h2.03
MultiLayer:
  the board outline again, w0.254

## Silkscreen, mask and mechanical layers (free items; w line width, h text height)
TopOverlay:
  lines w0.254: -37.44,-16.815 -32.944,-16.815 -32.944,-10.668 ; -34.13,2.624 -27.06,2.624 -26.33,2.624 -26.33,1.424
  text "1" at -8.738,-3.251 h1.52
  text ".Layer_Name" at -35.763,-24.003 h2.03
BottomOverlay:
  lines w0.254: -12.903,2.337 -12.903,2.083 ; -12.903,2.083 -12.903,2.083
  text ".Layer_Name" at -26.746,-24.003 h2.03
TopPaste:
  text ".Layer_Name" at -35.763,-24.003 h2.03
BottomPaste:
  region: -3.785,1.956 0.076,1.956 0.051,-0.686 -0.584,-0.686 -0.584,-1.346 -1.448,-1.346 -3.937,1.092 -3.937,1.956
  region: -19.634,1.829 -15.672,1.829 -15.672,0.635 -16.485,0.635 -17.653,-0.533 -19.177,-2.083 -19.431,-2.083 -19.431,-0.787 -19.837,-0.762 -19.812,1.829
  text ".Layer_Name" at -26.746,-24.003 h2.03
TopSolder:
  rectangle: -20.472,-8.23 -19.66,-7.315
  rectangle: -45.441,3.2 -38.506,3.658
  rectangle: -35.763,3.048 -34.95,3.962
  text ".Layer_Name" at -35.763,-24.003 h2.03
BottomSolder:
  text ".Layer_Name" at -26.746,-24.003 h2.03
Assembly:
  text "ASSEMBLY" at -42.367,-23.927 h1.53
Outline:
  the board outline again, w0.254
  text "TAG 102 REV.17" at -18.44,-23.165 h1.52
Title:
  lines w0.254: -49.913,-60.863 -49.913,-32.923 cw(c-47.373,-32.923) -47.373,-30.383 59.307,-30.383 cw(c59.307,-32.923) 61.847,-32.923 61.847,-60.863 cw(c59.307,-60.863) 59.307,-63.403 -47.373,-63.403 ; -49.913,-60.837 ccw(c-47.348,-60.837) -47.392,-63.403 ; -47.395,-62.133 cw(c-47.373,-60.863) -48.643,-60.863 -48.643,-58.323 cw(c-47.373,-58.323) -47.373,-57.053 -4.828,-57.053 cw(c-4.828,-58.323) -3.558,-58.323 -3.558,-60.863 ; -47.395,-55.783 cw(c-47.373,-54.513) -48.643,-54.513 -48.643,-48.798 cw(c-47.373,-48.798) -47.373,-47.528 -28.323,-47.528 ; -47.373,-62.133 -4.828,-62.133 ; -47.373,-55.783 -28.323,-55.783 ; -28.341,-47.529 cw(c-28.298,-48.772) -27.053,-48.772 ; -28.323,-46.258 -47.373,-46.258 cw(c-47.373,-44.988) -48.643,-44.988 -48.643,-39.273 cw(c-47.373,-39.273) -47.373,-38.003 -28.323,-38.003 ; -28.298,-55.783 ccw(c-28.298,-54.538) -27.053,-54.538 ; -28.298,-38.003 cw(c-28.298,-39.247) -27.053,-39.247 ; -28.272,-46.258 ccw(c-28.272,-45.039) -27.053,-45.039 ; -27.053,-54.513 -27.053,-48.798 ; -27.053,-44.988 -27.053,-39.273 ; -25.783,-54.538 ccw(c-24.538,-54.538) -24.538,-55.783 ; -25.783,-54.513 -25.783,-51.338 cw(c-24.513,-51.338) -24.513,-50.068 16.127,-50.068 ; -25.783,-47.553 ccw(c-24.538,-47.553) -24.538,-48.798 ; -25.783,-47.528 -25.783,-39.273 cw(c-24.513,-39.273) -24.513,-38.003 27.557,-38.003 cw(c27.557,-39.273) 28.827,-39.273 28.827,-47.528 ; -24.513,-55.783 16.127,-55.783 ; -24.513,-48.798 27.557,-48.798 ; -4.799,-62.133 ccw(c-4.777,-60.914) -3.559,-60.871 ; -1.04,-62.133 cw(c-1.018,-60.863) -2.288,-60.863 -2.288,-58.323 cw(c-1.018,-58.323) -1.018,-57.053 41.527,-57.053 cw(c41.527,-58.323) 42.797,-58.323 42.797,-60.863 ; -1.018,-62.133 41.527,-62.133 ; 16.152,-55.783 ccw(c16.152,-54.538) 17.397,-54.517 ; 16.152,-50.068 cw(c16.152,-51.312) 17.397,-51.312 ; 17.397,-54.513 17.397,-51.338 ; 18.667,-54.513 18.667,-51.338 ; 18.667,-54.487 ccw(c19.962,-54.487) 19.94,-55.783 ; 18.669,-51.351 cw(c19.886,-51.287) 19.886,-50.068 ; 19.937,-55.783 27.557,-55.783 ccw(c27.557,-54.513) 28.827,-54.513 28.827,-51.338 ; 19.937,-50.068 27.557,-50.068 ; 27.579,-48.798 ccw(c27.557,-47.528) 28.827,-47.528 ; 27.582,-50.068 cw(c27.582,-51.312) 28.827,-51.312 ; 30.097,-54.538 ccw(c31.342,-54.538) 31.363,-55.783 ; 30.097,-54.513 30.097,-51.338 cw(c31.367,-51.338) 31.367,-50.068 59.307,-50.068 ; 31.367,-55.783 59.307,-55.783 ccw(c59.307,-54.513) 60.577,-54.513 60.577,-51.312 ccw(c59.332,-51.312) 59.332,-50.068 ; 41.556,-62.133 ccw(c41.578,-60.914) 42.796,-60.871 ; 44.067,-60.888 ccw(c45.312,-60.888) 45.333,-62.133 ; 44.067,-60.863 44.067,-58.323 cw(c45.337,-58.323) 45.337,-57.053 59.307,-57.053 ; 45.337,-62.133 59.307,-62.133 ccw(c59.307,-60.863) 60.577,-60.863 60.577,-58.323 ; 59.289,-31.654 cw(c59.332,-32.897) 60.577,-32.897 ; 59.307,-57.053 cw(c59.307,-58.323) 60.577,-58.301 ; 59.307,-31.653 31.367,-31.653 ccw(c31.367,-32.923) 30.097,-32.923 30.097,-47.528 ccw(c31.367,-47.528) 31.367,-48.798 59.307,-48.798 ccw(c59.307,-47.528) 60.577,-47.528 60.577,-32.923 ; -48.643,-35.463 ccw(c-47.373,-35.463) -47.373,-36.733 27.557,-36.733 ccw(c27.557,-35.463) 28.827,-35.463 28.827,-32.923 ccw(c27.557,-32.923) 27.557,-31.653 -47.373,-31.653 ccw(c-47.373,-32.923) -48.643,-32.923 -48.643,-35.463
  text "Active Wave" at -21.211,-35.336 h2.44
  text "Active Wave" at 32.424,-36.218 h2.54
  text "902 Clint Moore Rd." at 31.154,-38.885 h1.63
  text "TITLE:" at -24.831,-40.225 h1.35
  text "ENGINEER:" at -47.373,-40.543 h1.35
  text "Suite 118" at 38.647,-41.552 h1.63
  text "Boca Raton FL." at 35.218,-43.965 h1.63
  text "Tag102" at -5.004,-44.552 h2.44
  text "PHONE:" at -47.373,-45.305 h1.35
  text "561-999-9422" at 36.615,-47.013 h1.63
  text "Drawn by:" at -47.373,-50.195 h1.35
  text "J.N" at -37.646,-50.222 h1.35
  text "PART NO.:" at -24.513,-52.29 h1.35
  text "REV:" at 19.619,-52.29 h1.35
  text "DATE:" at 31.367,-52.29 h1.35
  text ".Print_Date" at 41.902,-53.636 h1.35
  text "17" at 24.064,-54.195 h1.35
  text "PHONE:" at -47.373,-54.83 h1.35
  text "FILE NAME:" at -47.373,-59.339 h1.35
  text "LAYER:" at -0.637,-59.339 h1.35
  text "GERBER:" at 45.591,-59.339 h1.35
  text ".Pcb_File_Name_No_Path" at -35.712,-60.782 h1.35
Mechanical:
  circle w0.254: c-21.277,-17.17 r0.889
  circle w0.254: c-44.848,1.245 r0.889
  circle w0.254: c-45.407,-18.415 r0.889
  circle w0.254: c-21.302,1.626 r0.889
  circle w0.254: c-21.26,-17.17 r0.889
  circle w0.254: c-44.831,1.245 r0.889
  circle w0.254: c-45.39,-18.415 r0.889
  circle w0.254: c-21.285,1.626 r0.889
  circle w0.254: c-21.285,1.626 r0.889
  circle w0.254: c-45.39,-18.415 r0.889
  circle w0.254: c-44.831,1.245 r0.889
  circle w0.254: c-21.26,-17.17 r0.889
  lines w0.254: -46.042,-18.415 -44.772,-18.415 ; -45.483,1.245 -44.213,1.245 ; -45.407,-19.05 -45.407,-17.78 ; -44.848,0.61 -44.848,1.88 ; -43.248,-10.109 -41.978,-10.109 ; -42.613,-10.744 -42.613,-9.474 ; -39.286,-2.845 -38.016,-2.845 ; -38.651,-3.48 -38.651,-2.21 ; -36.111,3.505 -34.841,3.505 ; -35.476,2.87 -35.476,4.14 ; -34.358,-1.041 -33.088,-1.041 ; -33.875,-3.962 -32.605,-3.962 ; -33.723,-1.676 -33.723,-0.406 ; -33.24,-4.597 -33.24,-3.327 ; -33.151,-18.851 -32.253,-17.953 ; -33.151,-17.953 -32.253,-18.851 ; -30.84,-2.061 -29.942,-1.163 ; -30.84,-1.163 -29.942,-2.061 ; -30.015,-4.953 -28.745,-4.953 ; -29.38,-5.588 -29.38,-4.318 ; -27.766,-1.96 -26.868,-1.062 ; -27.766,-1.062 -26.868,-1.96 ; -26.649,-6.811 -25.751,-5.913 ; -26.649,-5.913 -25.751,-6.811 ; -24.616,-6.634 -23.718,-5.736 ; -24.616,-5.736 -23.718,-6.634 ; -21.937,1.626 -20.667,1.626 ; -21.912,-17.17 -20.642,-17.17 ; -21.302,0.991 -21.302,2.261 ; -21.277,-17.805 -21.277,-16.535 ; -47.092,-19.837 ccw(c-46.33,-19.837) -46.33,-20.599 ; -47.092,-19.837 ccw(c-46.33,-19.837) -46.33,-20.599 ; -47.092,-19.837 -47.092,3.759 ; -47.092,-19.837 -47.092,3.759 ; -47.092,-19.837 -47.092,3.759 ; -47.092,3.759 cw(c-46.33,3.759) -46.33,4.521 ; -46.33,-20.599 -20.472,-20.599 ; -46.33,-20.599 -20.472,-20.599 ; -46.33,-20.599 -20.472,-20.599 ; -46.33,4.521 -20.472,4.521 ; -46.33,4.521 -20.472,4.521 ; -46.33,4.521 -20.472,4.521 ; -21.971,-19.964 -20.701,-19.964 ; -21.971,-19.964 -21.971,-18.694 ; -21.971,-19.964 -21.971,-18.694 ; -21.971,-19.964 -20.701,-19.964 ; -21.971,-18.694 -20.701,-18.694 ; -21.971,-18.694 -20.701,-18.694 ; -20.701,-19.964 -20.701,-18.694 ; -20.701,-19.964 -20.701,-18.694 ; -20.472,-20.599 ccw(c-20.472,-19.837) -19.71,-19.837 ; -20.472,-20.599 ccw(c-20.472,-19.837) -19.71,-19.837 ; -20.472,4.521 cw(c-20.472,3.759) -19.71,3.759 ; -20.472,4.521 cw(c-20.472,3.759) -19.71,3.759 ; -19.71,-19.837 -19.71,3.759 ; -19.71,-19.837 -19.71,3.759 ; -47.109,-19.837 ccw(c-46.347,-19.837) -46.347,-20.599 -20.49,-20.599 ccw(c-20.49,-19.837) -19.728,-19.837 -19.728,3.759 ccw(c-20.49,3.759) -20.49,4.521 -46.347,4.521 ccw(c-46.347,3.759) -47.109,3.759 -47.109,-19.837
  text "NEW" at -31.445,-0.584 h0.76
  text "NEW" at -28.296,-0.584 h0.76
  text "NEW" at -27.229,-5.436 h0.76
  text "NEW" at -23.241,-6.655 h0.76
  text "NEW" at -33.68,-17.374 h0.76
  text "3V" at -21.641,-19.533 h0.38
  text "3V" at -21.641,-19.533 h0.38
DrillDrawing:
  lines w0.635: -49.007,75.654 -36.053,75.654
  text "NOTES" at -48.499,76.797 h2.54
  text "1) BOARD MEASURES .989 X  1.902 IN" at -48.499,71.717 h2.54
  text "2) MATERIAL IS .031 THICK FR4" at -48.499,66.637 h2.54
  text "3) 2 LAYER BOARD" at -48.499,61.557 h2.54
  text "4) COPPER WEIGHT IS 1 OUNCE" at -48.499,56.477 h2.54
  text "5) FINISH IS SMOBC" at -48.499,51.397 h2.54
  text "6) RECTANGULAR BOARD WITH NO CUTOUTS" at -48.499,46.317 h2.54
  text "7) ROUTE TO BOARD OUTLINE" at -48.499,41.237 h2.54
  text "8) ADD SILKSCREEN" at -48.499,36.157 h2.54
  text "9) NO SILKSCREEN ON PADS" at -48.499,31.077 h2.54
  text "10) GREEN SOLDER MASK BOTH SIDES" at -48.499,25.997 h2.54
  text "11) HASL ON ALL PADS AND VIAS" at -48.499,20.917 h2.54
  text "12) .122 MIL TOOLING HOLE SHALL BE +3-0 MILS TOL." at -48.473,15.862 h2.54
  text ".Legend" at 19.05,-20.32 h1.52

## Dimensions
-47.092,4.521 to 1.219,4.521 on Dimension
-47.092,-20.599 to -47.092,4.521 on Dimension

## Text inside footprints (layer, text, board x,y; h text height)
SP1: BottomOverlay "-" at -31.529,-18.058 h1.5 r90; BottomOverlay "+" at -42.129,-17.858 h1.5 r90; Assembly "-" at -33.829,-14.558 h1.5 r90; Assembly "+" at -39.929,-14.658 h1.5 r90